# Altium PCB Layout.pcbdoc
Units mil, origin at the board's own origin, x right, y up, seen from the top; angles counter-clockwise.
Board outline 3700.89 x 4949.45 mil, 2 copper layers (Top Layer, Bottom Layer); 20 components, 26 nets, 80 pads, 43 vias.
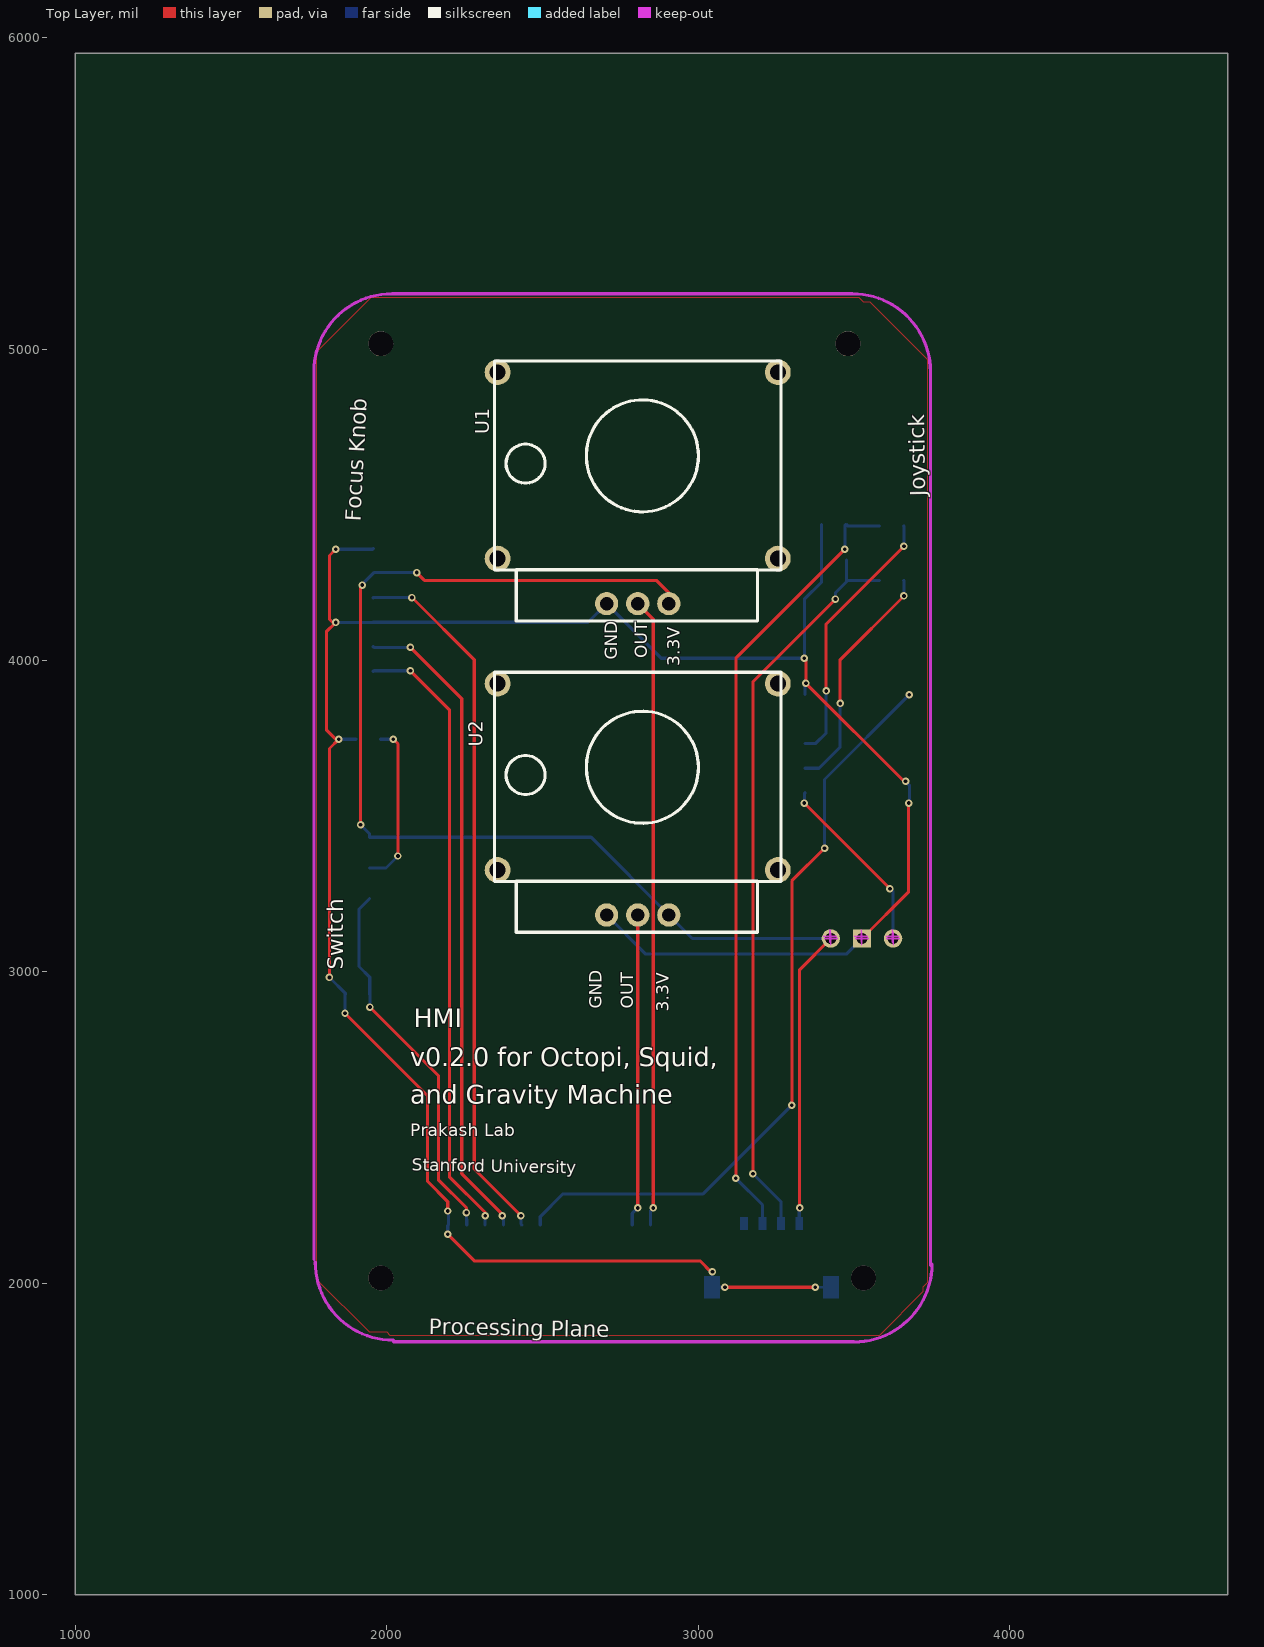
[diagram p0: Top Layer view]
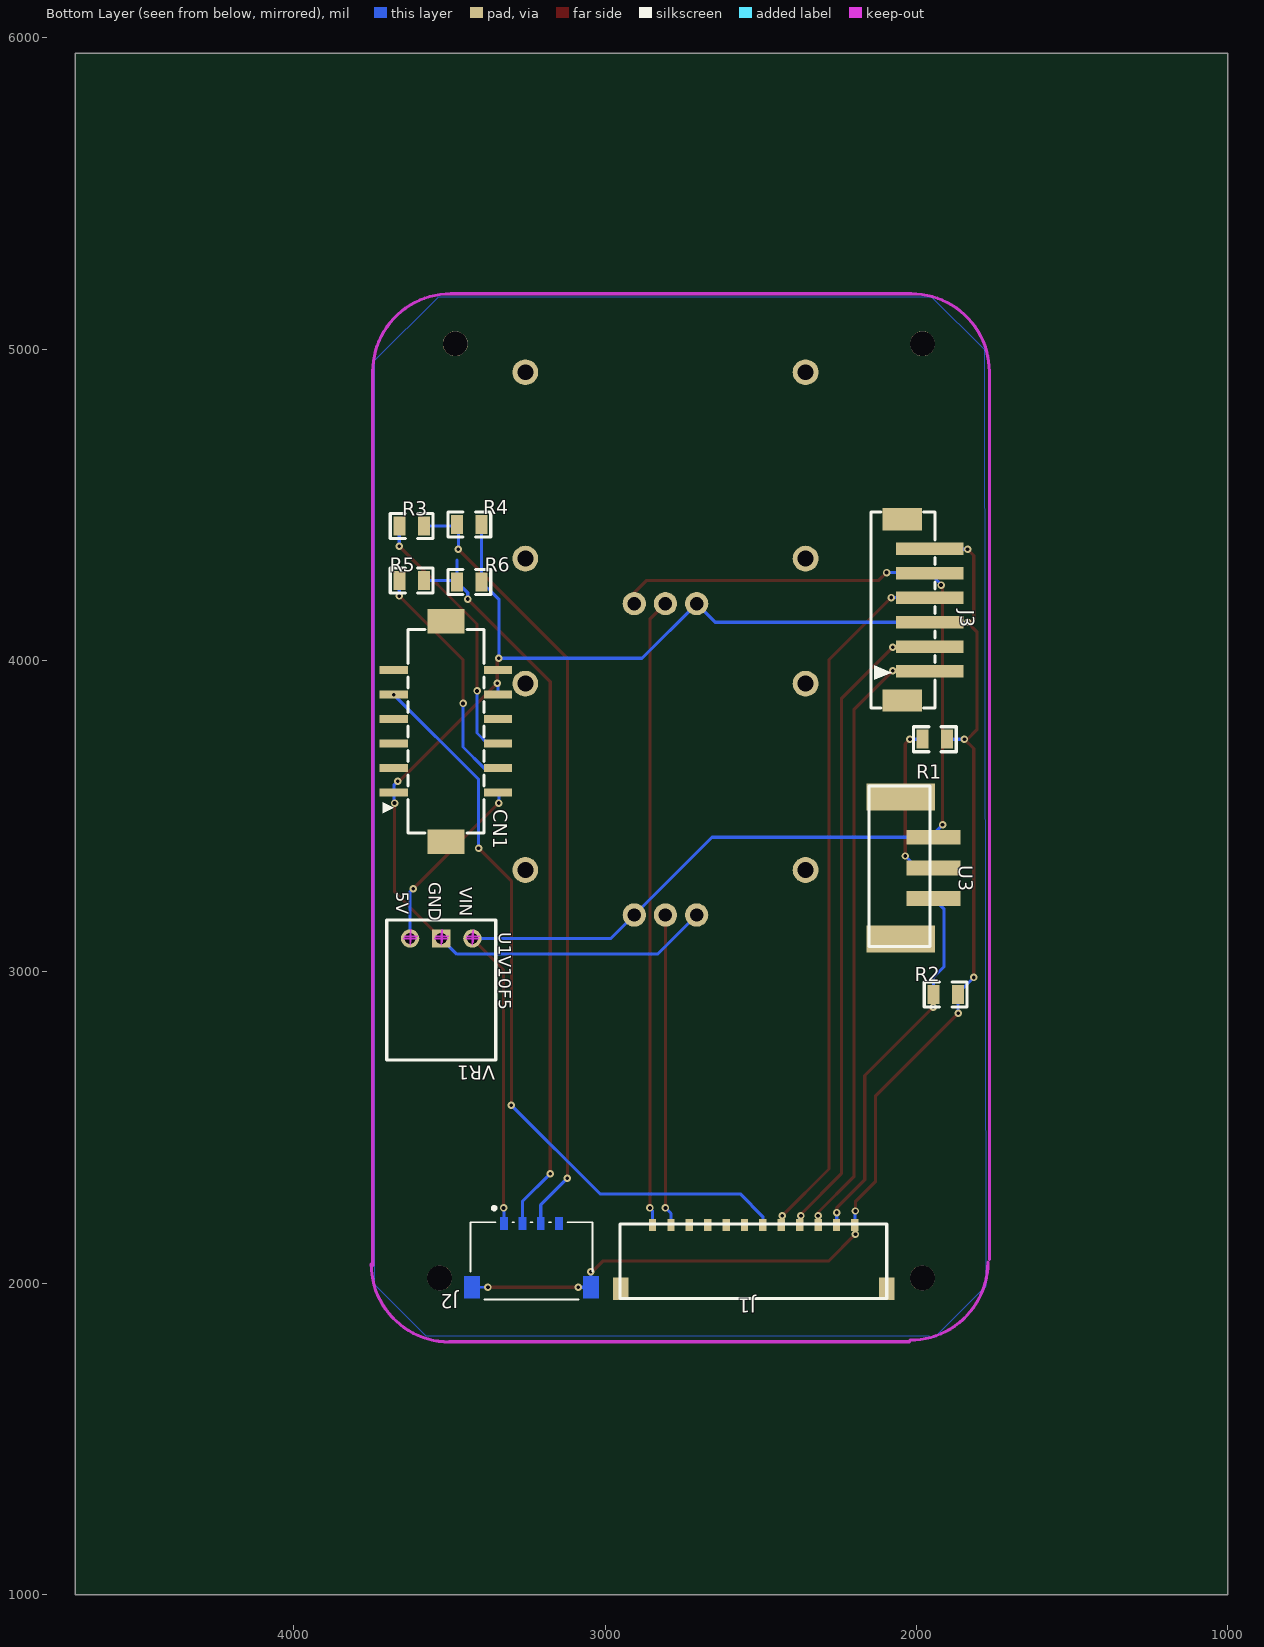
[diagram p1: Bottom Layer view, seen from below]

## Layer stack, top to bottom
Top Layer: signal copper (thickness not stored)
Dielectric: dielectric 12.6, FR-4, Dk 4.8
Bottom Layer: signal copper (thickness not stored)

## Board outline
4700.89,1000 1000,1000 1000,5949.45 4700.89,5949.45

## Components (designator, comment, footprint, x,y, rotation, side; value= is the part's Value field where it differs from the comment)
CN1 "DF11C-12DP-2V(57)" CONN-SMD_12P-P2.00_DF11C-12DP-2V(57) 3510.91,3771.99 r90 bottom
J1 "Molex_504050-1291" MOLEX_504050-1291 2185.91,2166.99 r180 bottom
J2 "MOLEX_504050-0491" MOLEX_504050-0491 3235.91,2071.99 r180 bottom
J3 "B6B-PH-SM4-TB(LF)(SN)" CONN-SMD_6P-P2.00_B6B-PH-SM4-TB(LF)(SN) 2000.91,4161.99 r90 bottom
R1 "1k" R0805 1940.91,3746.99 r180 bottom
R2 "1k" R0805 1905.91,2926.99 r180 bottom
R3 "1k" R0805 3620.91,4431.99 r180 bottom
R4 "2k" R0805 3435.91,4436.99 r180 bottom
R5 "1k" R0805 3620.91,4256.99 r180 bottom
R6 "2k" R0805 3435.91,4251.99 r180 bottom
U1 "PCW1J-C24-BAB103L" PCW1J-C24-BAB103L 2355.91,4326.99 r0 top
U2 "PCW1J-C24-BAB103L" PCW1J-C24-BAB103L 2355.91,3326.99 r0 top
U3 "277-10159-1-ND HEADER 3POS SMT WHITE" "277-10159-1-ND HEADER 3POS SMT WHITE" 2050.86,3561.95 r90 bottom
VR1 "U1V10F5" U1V10F5 3525.91,3106.99 r90 bottom
? "" ? 1741.45,3516.99 r0 top
? "" ? 2730.91,5229.72 r0 top
? "" ? 3427.69,4161.99 r0 top
? "" ? 2820.86,4960.67 r0 top
? "" ? 2759.38,1717.56 r0 top
? "" ? 3867.4,3494.49 r0 top

## Footprints (in the part's own frame and the unit in brackets; to place one, negate y for a bottom-side part, rotate by r counter-clockwise, add the part's x,y. Pads: shape width x height; smd on the part's side, far side on the other; paste and mask are expansions set on the pad)
"277-10159-1-ND HEADER 3POS SMT WHITE" [mm]
  rect 1.2x4.4 smd: 1(-3.3,-2.7) 2(-5.8,-2.7) 3(-8.3,-2.7)
  rect 2.2x5.6 smd: 4(0,0) 5(-11.6,0)
  silkscreen extent -12.21,-2.41 0.89,2.59
CONN-SMD_6P-P2.00_B6B-PH-SM4-TB(LF)(SN) [mm]
  rect 1x5.5 smd: 1(-5,-1.125) 2(-3,-1.125) 3(-1,-1.125) 4(1,-1.125) 5(3,-1.125) 6(5,-1.125)
  rect 1.8x3.2 smd: 7(7.4,1.125) 8(-7.4,1.125)
  silkscreen extent -8,-1.53 8,3.67
CONN-SMD_12P-P2.00_DF11C-12DP-2V(57) [mm]
  rect 0.65x2.3 smd: 1(-5,4.25) 2(-5,-4.25) 3(-3,4.25) 4(-3,-4.25) 5(-1,4.25) 6(-1,-4.25) 7(1,4.25) 8(1,-4.25) 9(3,4.25) 10(3,-4.25) 11(5,4.25) 12(5,-4.25)
  rect 2x3 smd: 13(9,0) 14(-9,0)
  silkscreen extent -8.3,-3.1 8.3,5.15
MOLEX_504050-0491 [mil]
  round 0 smd: 1(-88.58,119.68) 2(-29.53,119.68) 3(29.53,119.68) 4(88.58,119.68) 5(191.14,-84.65) 6(-191.14,-84.65)
  Top Layer region: -76.77,100 -100.39,100 -100.39,139.37 -76.77,139.37
  Top Layer region: -17.72,100 -41.34,100 -41.34,139.37 -17.72,139.37
  Top Layer region: 41.34,100 17.72,100 17.72,139.37 41.34,139.37
  Top Layer region: 100.39,100 76.77,100 76.77,139.37 100.39,139.37
  Top Layer region: 215.75,-120.08 166.54,-120.08 166.54,-49.21 215.75,-49.21
  Top Layer region: -166.54,-120.08 -215.75,-120.08 -215.75,-49.21 -166.54,-49.21
  silkscreen extent -196,-124 196,179
MOLEX_504050-1291 [mm]
  rect 1.25x1.8 smd: 0(-19.405,-4.69) 0(2.305,-4.69)
  rect 0.6x1 smd: 1(-16.8,0.5) 2(-15.3,0.5) 3(-13.8,0.5) 4(-12.3,0.5) 5(-10.8,0.5) 6(-9.3,0.5) 7(-7.8,0.5) 8(-6.3,0.5) 9(-4.8,0.5) 10(-3.3,0.5) 11(-1.8,0.5) 12(-0.3,0.5)
  silkscreen extent -19.44,-5.5 2.31,0.6
PCW1J-C24-BAB103L [mm]
  round 1.9 hole 1.1: 1(8.89,-3.67) 2(11.43,-3.67) 3(13.97,-3.67)
  round 2.1 hole 1.3: 4(0,15.2) 5(0,0) 6(22.86,15.2) 7(22.86,0)
  silkscreen extent -0.25,-5.08 23.12,16.13
R0805 [mm]
  rect 1x1.55 smd: 1(1,0) 2(-1,0)
  silkscreen extent -1.75,-1.02 1.75,1.02
U1V10F5 [mil]
  round 59 hole 36: 1(0,-100) 3(0,100)
  rect 59x59 hole 36: 2(0,0)
  Keep-Out Layer lines w5: 7.5,-122.5 7.5,-82.5 ; 0,-120 0,-80 ; -12.5,-102.5 27.5,-102.5 ; -20,-100 20,-100 ; 7.5,-22.5 7.5,17.5 ; 0,-20 0,20 ; -12.5,-2.5 27.5,-2.5 ; -20,0 20,0 ; 7.5,77.5 7.5,117.5 ; 0,80 0,120 ; -12.5,97.5 27.5,97.5 ; -20,100 20,100
  silkscreen extent -390,-175 60,175
? [mil]

## Free pads (board coordinates)
  round 80 hole 80 unplated: ""(1980.91,2016.99) ""(1980.91,5016.99) ""(3480.91,5016.99) ""(3530.91,2016.99)

## Via types
v1: diameter 24, hole 12, Top Layer to Bottom Layer, 43 vias

## Nets (pads, with @x,y where several pads share a name; then routed paths per layer and width w, separated by ;. In a path a pad name is that pad's centre, name@x,y a point inside that pad or via, vN(x,y) a via of type N, cw(c..) or ccw(c..) an arc to the next point about the centre after c; other vN are vias at no path point)
3.3V: J2.1 J3.5 U1.3 U2.3 U3.1 VR1.1 | length 4461.6
  Top Layer w10: v1(1915.91,3471.99) 1915.91,4236.99 v1(1920.91,4241.99) ; v1(2095.91,4281.99) 2120.91,4256.99 2865.91,4256.99 2905.91,4216.98 U1.3 ; v1(3325.91,2241.99) 3325.91,3006.99 VR1.1
  Bottom Layer w10: v1(1915.91,3471.99) 1944.56,3443.33 U3.1 2656.38,3432.03 U2.3 2981.41,3107 VR1.1 ; v1(1920.91,4241.99) 1920.91,4244.39 J3.5 1958.51,4281.99 v1(2095.91,4281.99) ; J2.1 3324.49,2240.57 v1(3325.91,2241.99)
40: J1.11 R2.2 U3.3 | length 1205.3
  Top Layer w10: v1(1945.91,2886.99) 2165.91,2666.99 2165.91,2331.99 2255.91,2241.99 v1(2255.91,2226.99)
  Bottom Layer w10: U3.3 1910.91,3201.52 1910.91,3016.99 1945.28,2982.61 R2.2 1945.91,2926.36 v1(1945.91,2886.99) ; v1@2255.86,2226.95 J1.11@2256.76,2186.65
A: J1.10 J3.1 | length 1999.8
  Top Layer w10: v1(2075.91,3966.99) 2200.91,3841.99 2200.91,2341.99 2315.91,2226.99 v1(2315.91,2216.99)
  Bottom Layer w10: J3.1 1958.46,3966.99 v1(2075.91,3966.99) ; J1.10@2315.86,2186.65 v1@2315.86,2216.95
A7: J1.1 U1.2 | length 2020.1
  Top Layer w10: U1.2 2855.91,4132.5 v1(2855.91,2241.99)
  Bottom Layer w10: J1.1 2847.33,2233.41 v1(2855.91,2241.99)
A8: J1.2 U2.2 | length 1003.1
  Top Layer w10: v1(2805.91,2241.99) U2.2
  Bottom Layer w10: J1.2 2788.27,2224.35 v1(2805.91,2241.99)
B: J1.9 J3.2 | length 2099.2
  Top Layer w10: v1(2075.91,4041.99) 2240.91,3876.99 2240.91,2351.99 2370.91,2221.99 v1(2370.91,2216.99)
  Bottom Layer w10: J3.2 1958.5,4041.99 v1(2075.91,4041.99) ; v1(2370.91,2216.99) 2374.89,2213.01 J1.9
BTN: CN1.9 J1.7 | length 2458
  Top Layer w10: v1(3300.91,2571.99) 3300.91,3291.99 v1(3405.91,3396.99)
  Bottom Layer w10: J1.7 2493,2214.08 2565.91,2286.99 3015.91,2286.99 v1(3300.91,2571.99) ; v1(3405.91,3396.99) 3405.91,3617.77 v1(3678.23,3890.1)
CN1_2: CN1.2 VR1.3 | length 587.3
  Top Layer w10: v1(3340.91,3541.99) v1(3615.91,3266.99)
  Bottom Layer w10: v1(3340.91,3541.99) 3340.91,3572.46 CN1.2 ; v1(3615.91,3266.99) 3625.91,3256.98 VR1.3
CN1_3: CN1.3
CN1_4: CN1.4 R5.2 | length 760.7
  Top Layer w10: v1(3455.91,3861.99) 3455.91,4001.99 v1(3660.91,4206.99)
  Bottom Layer w10: CN1.4 3387.8,3653.88 3455.91,3721.99 v1(3455.91,3861.99) ; R5.2 3660.91,4256.36 v1(3660.91,4206.99)
CN1_5: CN1.5
CN1_6: CN1.6 R3.2 | length 850.4
  Top Layer w10: v1(3410.91,3901.99) 3410.91,4116.99 v1(3660.91,4366.99)
  Bottom Layer w10: CN1.6 3376.54,3732.62 3410.91,3766.99 v1(3410.91,3901.99) ; R3.2 3660.91,4431.36 v1(3660.91,4366.99)
CN1_7: CN1.7
CN1_8: CN1.8
CN1_11: CN1.11
CN1_12: CN1.12
GND: CN1.1 CN1.10 J1.12 J2.5 J2.6 J3.3 J3.6 R1.1 R2.1 R4.1 R6.1 U1.1 U2.1 VR1.2 | length 8030.4
  Top Layer w10: v1(1815.91,2981.99) 1815.91,3716.99 v1(1845.91,3746.99) 1835.91,3746.99 1805.91,3776.99 1805.91,4091.99 v1(1835.91,4121.99) 1825.91,4121.99 1815.91,4131.99 1815.91,4336.99 v1(1835.91,4356.99) ; v1(1865.91,2866.99) 2130.91,2601.99 2130.91,2326.99 2195.91,2261.99 v1(2195.91,2231.99) ; v1(2195.91,2156.99) 2280.91,2071.99 2975.91,2071.99 3005.91,2071.99 3040.91,2036.99 v1(3045.91,2036.99) ; v1(3085.91,1986.99) v1(3375.91,1986.99) ; v1(3340.91,4006.99) 3345.91,4001.99 v1(3345.91,3926.99) 3660.91,3611.99 v1(3665.91,3611.99) ; VR1.2 3675.91,3256.98 v1(3675.91,3541.99)
  Bottom Layer w10: v1(1815.91,2981.99) 1866.54,2931.35 R2.1 1865.91,2926.35 v1(1865.91,2866.99) ; v1@1835.86,4121.95 J3.3 ; v1(1835.91,4356.99) 1954.77,4356.99 J3.6 ; v1(1845.91,3746.99) R1.1 ; J3.3 2646.03,4122.62 U1.1 2881.42,4006.99 v1(3340.91,4006.99) 3340.91,4196.35 R6.1 R4.1 ; v1(2195.91,2156.99) 2195.91,2184.86 J1.12 2197.72,2230.18 v1(2195.91,2231.99) ; U2.1 2831.42,3056.99 3475.91,3056.99 VR1.2 ; v1(3045.91,2036.99) 3044.77,2035.85 J2.5 3045.12,1986.99 v1(3085.91,1986.99) ; CN1.10 3343.58,3924.66 v1(3345.91,3926.99) ; v1@3375.86,1986.95 3427.06,1987.35 ; v1(3665.91,3611.99) 3678.23,3599.66 CN1.1 3678.23,3544.31 v1(3675.91,3541.99)
IDX: J1.8 J3.4 | length 2291.9
  Top Layer w10: v1(2080.91,4201.99) 2280.91,4001.99 2280.91,2366.99 ; 2280.91,2372.82 2280.91,2366.99 ; v1(2430.91,2216.99) 2280.91,2366.99
  Bottom Layer w10: J3.4 1957.24,4201.99 v1(2080.91,4201.99) ; v1(2430.91,2216.99) 2430.91,2189.7 J1.8
J1_3: J1.3
J1_4: J1.4
J1_5: J1.5
J1_6: J1.6
J2_4: J2.4
U3_2: R1.2 U3.2 | length 529.1
  Top Layer w10: v1(2020.91,3746.99) 2035.91,3731.99 v1(2035.91,3371.99)
  Bottom Layer w10: U3.2 1997.52,3333.6 v1(2035.91,3371.99) ; R1.2 v1(2020.91,3746.99)
X: J2.2 R5.1 R6.2 | length 2400
  Top Layer w10: v1(3175.91,2351.99) 3175.91,3931.99 v1(3440.91,4196.99)
  Bottom Layer w10: v1(3175.91,2351.99) 3265.45,2262.45 J2.2 ; v1(3440.91,4196.99) 3440.91,4217.61 R6.2 ; 3475.91,4321.99 3475.91,4252.61 R6.2 ; R5.1 3480.28,4256.99 R6.2
Y: J2.3 R3.1 R4.2 | length 2535.8
  Top Layer w10: v1(3120.91,2336.99) 3120.91,4006.99 v1(3470.91,4356.99)
  Bottom Layer w10: v1(3120.91,2336.99) 3206.38,2251.52 J2.3 ; v1(3470.91,4356.99) 3470.91,4432.61 R4.2 3480.28,4431.99 R3.1
pads on no net: CN1.13 CN1.14 J1.0 J3.7 J3.8 U1.4 U1.5 U1.6 U1.7 U2.4 U2.5 U2.6 U2.7 U3.4 U3.5

## Polygon pours and split planes (outlines as drawn)
GND on Top Layer (solid): 1775.91,4966.99 1775.91,4991.99 1950.91,5166.99 3515.91,5166.99 3530.91,5151.99 3550.91,5151.99 3735.91,4966.99 3735.91,2001.99 3720.91,1986.99 3720.91,1971.99 3580.91,1831.99 2010.91,1831.99 2000.91,1841.99 1945.91,1841.99 1775.91,2011.99
GND on Bottom Layer (solid): 1780.91,4986.99 1780.91,4996.99 1950.91,5166.99 3530.91,5166.99 3535.91,5166.99 3740.91,4961.99 3740.91,1996.99 3735.91,1991.99 3575.91,1831.99 1960.91,1831.99 1955.91,1826.99 1940.91,1826.99 1775.91,1991.99

## Keep-outs
Keep-Out Layer:
  lines w10: 1765.91,4926.99 cw(c2016.41,4926.99) 2016.41,5177.49 ; 1770.4,2067.49 ccw(c2020.9,2067.49) 2020.9,1816.99 ; 3495.41,5177.49 cw(c3495.41,4926.99) 3745.91,4926.99 ; 3500.4,1811.49 ccw(c3500.4,2061.99) 3750.9,2061.99

## Silkscreen, mask and mechanical layers (free items; w line width, h text height)
Top Overlay:
  text "Joystick" at 3730.91,4527.42 h50 r91
  text "Focus Knob" at 1915.88,4445.68 h50 r87
  text "OUT" at 2835.91,4006.99 h40 r90
  text "GND" at 2740.91,4001.99 h40 r90
  text "3.3V" at 2940.91,3981.99 h40 r90
  text "Switch" at 1860.91,3006.99 h50 r90
  text "GND" at 2690.91,2881.99 h40 r90
  text "OUT" at 2790.91,2881.99 h40 r90
  text "3.3V" at 2905.91,2871.99 h40 r90
  text "HMI" at 2085.91,2821.99 h60
  text "v0.2.0 for Octopi, Squid," at 2075.91,2696.99 h60
  text "and Gravity Machine" at 2075.91,2576.99 h60
  text "Prakash Lab" at 2075.9,2471.99 h40
  text "Stanford University" at 2080.55,2361.99 h40 r359
  text "Processing Plane" at 2135.48,1836.99 h50 r359

## Text inside footprints (layer, text, board x,y; h text height)
VR1: Bottom Overlay "VIN" at 3465.91,3272 h40 r90; Bottom Overlay "5V" at 3670.94,3256.99 h40 r90; Bottom Overlay "GND" at 3565.91,3287 h40 r90